# Altium PCB TC-temp-logger-base.PcbDoc (part 3 of 5)
Units mil, origin at the board's own origin, x right, y up, seen from the top; angles counter-clockwise.
Board outline 6370.08 x 6889.76 mil, 4 copper layers (Top Layer, Layer 2, Layer 1, Bottom Layer), stack 61.581 mil thick; 216 components, 163 nets, 792 pads, 3713 vias.
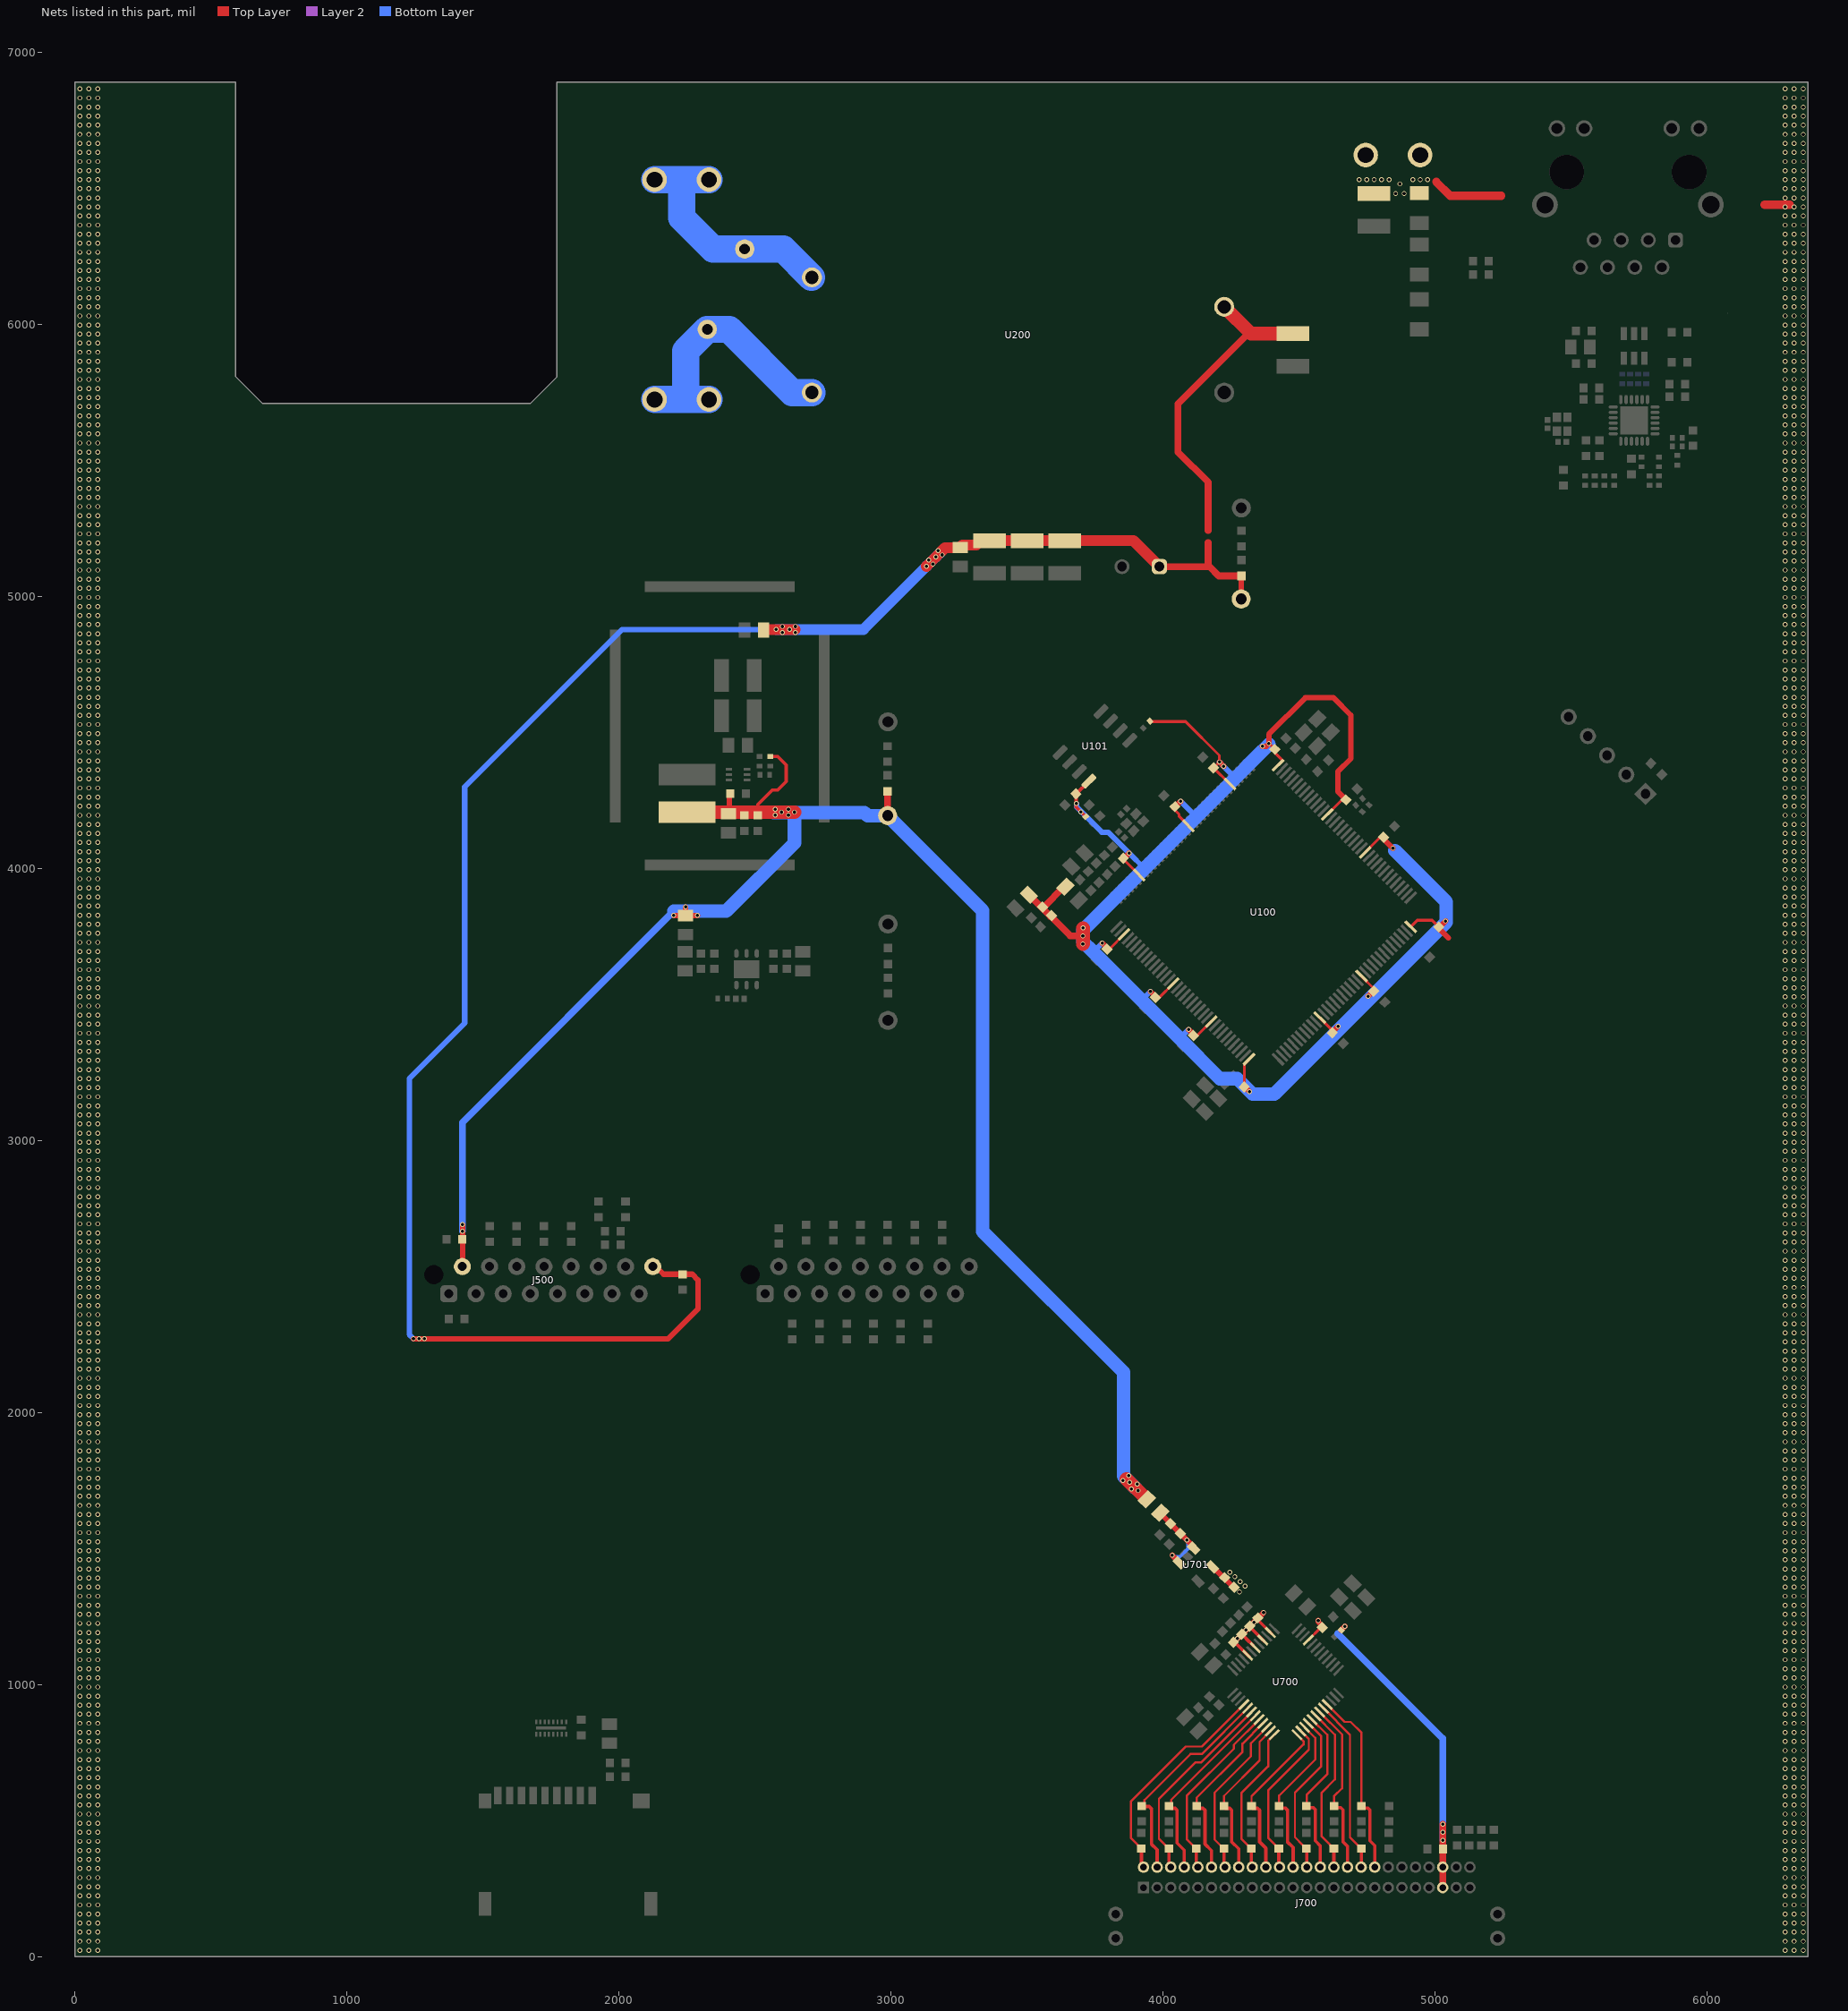
[diagram p4: the nets of this part, all layers, seen from the top]

## Via types
v1: diameter 17.72, hole 11.81, Top Layer to Bottom Layer, tented both sides, 3702 vias
v2: diameter 23.62, hole 11.81, Top Layer to Bottom Layer, 9 vias
v3: diameter 19.68, hole 7.87, Top Layer to Bottom Layer, tented both sides, 2 vias

## Nets (pads, with @x,y where several pads share a name; then routed paths per layer and width w, separated by ;. In a path a pad name is that pad's centre, name@x,y a point inside that pad or via, vN(x,y) a via of type N, cw(c..) or ccw(c..) an arc to the next point about the centre after c; other vN are vias at no path point) (continued)
AC_PE: (continued)
  other v1: 16.9,22.59 50.28,22.59 83.66,22.59 6286.42,22.59 6319.8,22.59 6353.17,22.59 16.9,55.97 50.28,55.97 83.66,55.97 6286.42,55.97 6319.8,55.97 6353.17,55.97 16.9,89.35 50.28,89.35 83.66,89.35 6286.42,89.35 6319.8,89.35 6353.17,89.35 16.9,122.73 50.28,122.73 83.66,122.73 6286.42,122.73 6319.8,122.73 6353.17,122.73 16.9,156.11 50.28,156.11 83.66,156.11 6286.42,156.11 6319.8,156.11 6353.17,156.11 16.9,189.49 50.28,189.49 83.66,189.49 6286.42,189.49 6319.8,189.49 6353.17,189.49 16.9,222.86 50.28,222.86 83.66,222.86 6286.42,222.86 6319.8,222.86 6353.17,222.86 16.9,256.24 50.28,256.24 83.66,256.24 6286.42,256.24 6319.8,256.24 6353.17,256.24 16.9,289.62 50.28,289.62 83.66,289.62 6286.42,289.62 6319.8,289.62 6353.17,289.62 16.9,323 50.28,323 83.66,323 6286.42,323 6319.8,323 6353.17,323 16.9,356.38 50.28,356.38 83.66,356.38 6286.42,356.38 6319.8,356.38 6353.17,356.38 16.9,389.76 50.28,389.76 83.66,389.76 6286.42,389.76 6319.8,389.76 6353.17,389.76 16.9,423.14 50.28,423.14 83.66,423.14 6286.42,423.14 6319.8,423.14 6353.17,423.14 16.9,456.51 50.28,456.51 83.66,456.51 6286.42,456.51 6319.8,456.51 6353.17,456.51 16.9,489.89 50.28,489.89 83.66,489.89 6286.42,489.89 6319.8,489.89 6353.17,489.89 16.9,523.27 50.28,523.27 83.66,523.27 6286.42,523.27 6319.8,523.27 6353.17,523.27 16.9,556.65 50.28,556.65 83.66,556.65 6286.42,556.65 6319.8,556.65 6353.17,556.65 16.9,590.03 50.28,590.03 83.66,590.03 6286.42,590.03 6319.8,590.03 6353.17,590.03 16.9,623.41 50.28,623.41 83.66,623.41 6286.42,623.41 6319.8,623.41 6353.17,623.41 16.9,656.79 50.28,656.79 83.66,656.79 6286.42,656.79 6319.8,656.79 6353.17,656.79 16.9,690.17 50.28,690.17 83.66,690.17 6286.42,690.16 6319.8,690.16 6353.17,690.16 16.9,723.54 50.28,723.54 83.66,723.54 6286.42,723.54 6319.8,723.54 6353.17,723.54 16.9,756.92 50.28,756.92 83.66,756.92 6286.42,756.92 6319.8,756.92 6353.17,756.92 16.9,790.3 50.28,790.3 83.66,790.3 6286.42,790.3 6319.8,790.3 6353.17,790.3 16.9,823.68 50.28,823.68 83.66,823.68 6286.42,823.68 6319.8,823.68 6353.17,823.68 16.9,857.06 50.28,857.06 83.66,857.06 6286.42,857.06 6319.8,857.06 6353.17,857.06 16.9,890.44 50.28,890.44 83.66,890.44 6286.42,890.44 6319.8,890.44 6353.17,890.44 16.9,923.82 50.28,923.82 83.66,923.82 6286.42,923.81 6319.8,923.81 6353.17,923.81 16.9,957.19 50.28,957.19 83.66,957.19 6286.42,957.19 6319.8,957.19 6353.17,957.19 16.9,990.57 50.28,990.57 83.66,990.57 6286.42,990.57 6319.8,990.57 6353.17,990.57 16.9,1023.95 50.28,1023.95 83.66,1023.95 6286.42,1023.95 6319.8,1023.95 6353.17,1023.95 16.9,1057.33 50.28,1057.33 83.66,1057.33 6286.42,1057.33 6319.8,1057.33 6353.17,1057.33 16.9,1090.71 50.28,1090.71 83.66,1090.71 6286.42,1090.71 6319.8,1090.71 6353.17,1090.71 16.9,1124.09 50.28,1124.09 83.66,1124.09 6286.42,1124.09 6319.8,1124.09 6353.17,1124.09 16.9,1157.47 50.28,1157.47 83.66,1157.47 6286.42,1157.46 6319.8,1157.46 6353.17,1157.46 16.9,1190.84 50.28,1190.84 83.66,1190.84 6286.42,1190.84 6319.8,1190.84 6353.17,1190.84 16.9,1224.22 50.28,1224.22 83.66,1224.22 6286.42,1224.22 6319.8,1224.22 6353.17,1224.22 16.9,1257.6 50.28,1257.6 83.66,1257.6 6286.42,1257.6 6319.8,1257.6 6353.17,1257.6 16.9,1290.98 50.28,1290.98 83.66,1290.98 6286.42,1290.98 6319.8,1290.98 6353.17,1290.98 16.9,1324.36 50.28,1324.36 83.66,1324.36 6286.42,1324.36 6319.8,1324.36 6353.17,1324.36 16.9,1357.74 50.28,1357.74 83.66,1357.74 6286.42,1357.74 6319.8,1357.74 6353.17,1357.74 16.9,1391.12 50.28,1391.12 83.66,1391.12 6286.42,1391.12 6319.8,1391.12 6353.17,1391.12 16.9,1424.49 50.28,1424.49 83.66,1424.49 6286.42,1424.49 6319.8,1424.49 6353.17,1424.49 16.9,1457.87 50.28,1457.87 83.66,1457.87 6286.42,1457.87 6319.8,1457.87 6353.17,1457.87 16.9,1491.25 50.28,1491.25 83.66,1491.25 6286.42,1491.25 6319.8,1491.25 6353.17,1491.25 16.9,1524.63 50.28,1524.63 83.66,1524.63 6286.42,1524.63 6319.8,1524.63 6353.17,1524.63 16.9,1558.01 50.28,1558.01 83.66,1558.01 6286.42,1558.01 6319.8,1558.01 6353.17,1558.01 16.9,1591.39 50.28,1591.39 83.66,1591.39 6286.42,1591.39 6319.8,1591.39 6353.17,1591.39 16.9,1624.77 50.28,1624.77 83.66,1624.77 6286.42,1624.77 6319.8,1624.77 6353.17,1624.77 16.9,1658.14 50.28,1658.14 83.66,1658.14 6286.42,1658.14 6319.8,1658.14 6353.17,1658.14 16.9,1691.52 50.28,1691.52 83.66,1691.52 6286.42,1691.52 6319.8,1691.52 6353.17,1691.52 16.9,1724.9 50.28,1724.9 83.66,1724.9 6286.42,1724.9 6319.8,1724.9 6353.17,1724.9 16.9,1758.28 50.28,1758.28 83.66,1758.28 6286.42,1758.28 6319.8,1758.28 6353.17,1758.28 16.9,1791.66 50.28,1791.66 83.66,1791.66 6286.42,1791.66 6319.8,1791.66 6353.17,1791.66 16.9,1825.04 50.28,1825.04 83.66,1825.04 6286.42,1825.04 6319.8,1825.04 6353.17,1825.04 16.9,1858.42 50.28,1858.42 83.66,1858.42 6286.42,1858.42 6319.8,1858.42 6353.17,1858.42 16.9,1891.79 50.28,1891.79 83.66,1891.79 6286.42,1891.79 6319.8,1891.79 6353.17,1891.79 16.9,1925.17 50.28,1925.17 83.66,1925.17 6286.42,1925.17 6319.8,1925.17 6353.17,1925.17 16.9,1958.55 50.28,1958.55 83.66,1958.55 6286.42,1958.55 6319.8,1958.55 6353.17,1958.55 16.9,1991.93 50.28,1991.93 83.66,1991.93 6286.42,1991.93 6319.8,1991.93 6353.17,1991.93 16.9,2025.31 50.28,2025.31 83.66,2025.31 6286.42,2025.31 6319.8,2025.31 6353.17,2025.31 16.9,2058.69 50.28,2058.69 83.66,2058.69 6286.42,2058.69 6319.8,2058.69 6353.17,2058.69 16.9,2092.07 50.28,2092.07 83.66,2092.07 6286.42,2092.07 6319.8,2092.07 6353.17,2092.07 16.9,2125.44 50.28,2125.44 83.66,2125.44 6286.42,2125.44 6319.8,2125.44 6353.17,2125.44 16.9,2158.82 50.28,2158.82 83.66,2158.82 6286.42,2158.82 6319.8,2158.82 6353.17,2158.82 16.9,2192.2 50.28,2192.2 83.66,2192.2 6286.42,2192.2 6319.8,2192.2 6353.17,2192.2 16.9,2225.58 50.28,2225.58 83.66,2225.58 6286.42,2225.58 6319.8,2225.58 6353.17,2225.58 16.9,2258.96 50.28,2258.96 83.66,2258.96 6286.42,2258.96 6319.8,2258.96 6353.17,2258.96 16.9,2292.34 50.28,2292.34 83.66,2292.34 6286.42,2292.34 6319.8,2292.34 6353.17,2292.34 16.9,2325.72 50.28,2325.72 83.66,2325.72 6286.42,2325.72 6319.8,2325.72 6353.17,2325.72 16.9,2359.1 50.28,2359.1 83.66,2359.1 6286.42,2359.09 6319.8,2359.09 6353.17,2359.09 16.9,2392.47 50.28,2392.47 83.66,2392.47 6286.42,2392.47 6319.8,2392.47 6353.17,2392.47 16.9,2425.85 50.28,2425.85 83.66,2425.85 6286.42,2425.85 6319.8,2425.85 6353.17,2425.85 16.9,2459.23 50.28,2459.23 83.66,2459.23 6286.42,2459.23 6319.8,2459.23 6353.17,2459.23 16.9,2492.61 50.28,2492.61 83.66,2492.61 6286.42,2492.61 6319.8,2492.61 6353.17,2492.61 16.9,2525.99 50.28,2525.99 83.66,2525.99 6286.42,2525.99 6319.8,2525.99 6353.17,2525.99 16.9,2559.37 50.28,2559.37 83.66,2559.37 6286.42,2559.37 6319.8,2559.37 6353.17,2559.37 16.9,2592.75 50.28,2592.75 83.66,2592.75 6286.42,2592.74 6319.8,2592.74 6353.17,2592.74 16.9,2626.12 50.28,2626.12 83.66,2626.12 6286.42,2626.12 6319.8,2626.12 6353.17,2626.12 16.9,2659.5 50.28,2659.5 83.66,2659.5 6286.42,2659.5 6319.8,2659.5 6353.17,2659.5 16.9,2692.88 50.28,2692.88 83.66,2692.88 6286.42,2692.88 6319.8,2692.88 6353.17,2692.88 16.9,2726.26 50.28,2726.26 83.66,2726.26 6286.42,2726.26 6319.8,2726.26 6353.17,2726.26 16.9,2759.64 50.28,2759.64 83.66,2759.64 6286.42,2759.64 6319.8,2759.64 6353.17,2759.64 16.9,2793.02 50.28,2793.02 83.66,2793.02 6286.42,2793.02 6319.8,2793.02 6353.17,2793.02 16.9,2826.4 50.28,2826.4 83.66,2826.4 6286.42,2826.39 6319.8,2826.39 6353.17,2826.39 16.9,2859.77 50.28,2859.77 83.66,2859.77 6286.42,2859.77 6319.8,2859.77 6353.17,2859.77 16.9,2893.15 50.28,2893.15 83.66,2893.15 6286.42,2893.15 6319.8,2893.15 6353.17,2893.15 16.9,2926.53 50.28,2926.53 83.66,2926.53 6286.42,2926.53 6319.8,2926.53 6353.17,2926.53 16.9,2959.91 50.28,2959.91 83.66,2959.91 6286.42,2959.91 6319.8,2959.91 6353.17,2959.91 16.9,2993.29 50.28,2993.29 83.66,2993.29 6286.42,2993.29 6319.8,2993.29 6353.17,2993.29 16.9,3026.67 50.28,3026.67 83.66,3026.67 6286.42,3026.67 6319.8,3026.67 6353.17,3026.67 16.9,3060.05 50.28,3060.05 83.66,3060.05 6286.42,3060.05 6319.8,3060.05 6353.17,3060.05 16.9,3093.42 50.28,3093.42 83.66,3093.42 6286.42,3093.42 6319.8,3093.42 6353.17,3093.42 16.9,3126.8 50.28,3126.8 83.66,3126.8 6286.42,3126.8 6319.8,3126.8 6353.17,3126.8 16.9,3160.18 50.28,3160.18 83.66,3160.18 6286.42,3160.18 6319.8,3160.18 6353.17,3160.18 16.9,3193.56 50.28,3193.56 83.66,3193.56 6286.42,3193.56 6319.8,3193.56 6353.17,3193.56 16.9,3226.94 50.28,3226.94 83.66,3226.94 6286.42,3226.94 6319.8,3226.94 6353.17,3226.94 16.9,3260.32 50.28,3260.32 83.66,3260.32 6286.42,3260.32 6319.8,3260.32 6353.17,3260.32 16.9,3293.7 50.28,3293.7 83.66,3293.7 6286.42,3293.7 6319.8,3293.7 6353.17,3293.7 16.9,3327.07 50.28,3327.07 83.66,3327.07 6286.42,3327.07 6319.8,3327.07 6353.17,3327.07 16.9,3360.45 50.28,3360.45 83.66,3360.45 6286.42,3360.45 6319.8,3360.45 6353.17,3360.45 16.9,3393.83 50.28,3393.83 83.66,3393.83 6286.42,3393.83 6319.8,3393.83 6353.17,3393.83 16.9,3427.21 50.28,3427.21 83.66,3427.21 6286.42,3427.21 6319.8,3427.21 6353.17,3427.21 16.9,3460.59 50.28,3460.59 83.66,3460.59 6286.42,3460.59 6319.8,3460.59 6353.17,3460.59 16.9,3493.97 50.28,3493.97 83.66,3493.97 6286.42,3493.97 6319.8,3493.97 6353.17,3493.97 16.9,3527.35 50.28,3527.35 83.66,3527.35 6286.42,3527.35 6319.8,3527.35 6353.17,3527.35 16.9,3560.72 50.28,3560.72 83.66,3560.72 6286.42,3560.72 6319.8,3560.72 6353.17,3560.72 16.9,3594.1 50.28,3594.1 83.66,3594.1 6286.42,3594.1 6319.8,3594.1 6353.17,3594.1 16.9,3627.48 50.28,3627.48 83.66,3627.48 6286.42,3627.48 6319.8,3627.48 6353.17,3627.48 16.9,3660.86 50.28,3660.86 83.66,3660.86 6286.42,3660.86 6319.8,3660.86 6353.17,3660.86 16.9,3694.24 50.28,3694.24 83.66,3694.24 6286.42,3694.24 6319.8,3694.24 6353.17,3694.24 16.9,3727.62 50.28,3727.62 83.66,3727.62 6286.42,3727.62 6319.8,3727.62 6353.17,3727.62 16.9,3761 50.28,3761 83.66,3761 6286.42,3761 6319.8,3761 6353.17,3761 16.9,3794.37 50.28,3794.37 83.66,3794.37 6286.42,3794.37 6319.8,3794.37 6353.17,3794.37 16.9,3827.75 50.28,3827.75 83.66,3827.75 6286.42,3827.75 6319.8,3827.75 6353.17,3827.75 16.9,3861.13 50.28,3861.13 83.66,3861.13 6286.42,3861.13 6319.8,3861.13 6353.17,3861.13 16.9,3894.51 50.28,3894.51 83.66,3894.51 6286.42,3894.51 6319.8,3894.51 6353.17,3894.51 16.9,3927.89 50.28,3927.89 83.66,3927.89 6286.42,3927.89 6319.8,3927.89 6353.17,3927.89 16.9,3961.27 50.28,3961.27 83.66,3961.27 6286.42,3961.27 6319.8,3961.27 6353.17,3961.27 16.9,3994.65 50.28,3994.65 83.66,3994.65 6286.42,3994.65 6319.8,3994.65 6353.17,3994.65 16.9,4028.03 50.28,4028.03 83.66,4028.03 6286.42,4028.02 6319.8,4028.02 6353.17,4028.02 16.9,4061.4 50.28,4061.4 83.66,4061.4 6286.42,4061.4 6319.8,4061.4 6353.17,4061.4 16.9,4094.78 50.28,4094.78 83.66,4094.78 6286.42,4094.78 6319.8,4094.78 6353.17,4094.78 16.9,4128.16 50.28,4128.16 83.66,4128.16 6286.42,4128.16 6319.8,4128.16 6353.17,4128.16 16.9,4161.54 50.28,4161.54 83.66,4161.54 6286.42,4161.54 6319.8,4161.54 6353.17,4161.54 16.9,4194.92 50.28,4194.92 83.66,4194.92 6286.42,4194.92 6319.8,4194.92 6353.17,4194.92 16.9,4228.3 50.28,4228.3 83.66,4228.3 6286.42,4228.3 6319.8,4228.3 6353.17,4228.3 16.9,4261.68 50.28,4261.68 83.66,4261.68 6286.42,4261.67 6319.8,4261.67 6353.17,4261.67 16.9,4295.05 50.28,4295.05 83.66,4295.05 6286.42,4295.05 6319.8,4295.05 6353.17,4295.05 16.9,4328.43 50.28,4328.43 83.66,4328.43 6286.42,4328.43 6319.8,4328.43 6353.17,4328.43 16.9,4361.81 50.28,4361.81 83.66,4361.81 6286.42,4361.81 6319.8,4361.81 6353.17,4361.81 16.9,4395.19 50.28,4395.19 83.66,4395.19 6286.42,4395.19 6319.8,4395.19 6353.17,4395.19 16.9,4428.57 50.28,4428.57 83.66,4428.57 6286.42,4428.57 6319.8,4428.57 6353.17,4428.57 16.9,4461.95 50.28,4461.95 83.66,4461.95 6286.42,4461.95 6319.8,4461.95 6353.17,4461.95 16.9,4495.33 50.28,4495.33 83.66,4495.33 6286.42,4495.32 6319.8,4495.32 6353.17,4495.32 16.9,4528.7 50.28,4528.7 83.66,4528.7 6286.42,4528.7 6319.8,4528.7 6353.17,4528.7 16.9,4562.08 50.28,4562.08 83.66,4562.08 6286.42,4562.08 6319.8,4562.08 6353.17,4562.08 16.9,4595.46 50.28,4595.46 83.66,4595.46 6286.42,4595.46 6319.8,4595.46 6353.17,4595.46 16.9,4628.84 50.28,4628.84 83.66,4628.84 6286.42,4628.84 6319.8,4628.84 6353.17,4628.84 16.9,4662.22 50.28,4662.22 83.66,4662.22 6286.42,4662.22 6319.8,4662.22 6353.17,4662.22 16.9,4695.6 50.28,4695.6 83.66,4695.6 6286.42,4695.6 6319.8,4695.6 6353.17,4695.6 16.9,4728.98 50.28,4728.98 83.66,4728.98 6286.42,4728.98 6319.8,4728.98 6353.17,4728.98 16.9,4762.35 50.28,4762.35 83.66,4762.35 6286.42,4762.35 6319.8,4762.35 6353.17,4762.35 16.9,4795.73 50.28,4795.73 83.66,4795.73 6286.42,4795.73 6319.8,4795.73 6353.17,4795.73 16.9,4829.11 50.28,4829.11 83.66,4829.11 6286.42,4829.11 6319.8,4829.11 6353.17,4829.11 16.9,4862.49 50.28,4862.49 83.66,4862.49 6286.42,4862.49 6319.8,4862.49 6353.17,4862.49 16.9,4895.87 50.28,4895.87 83.66,4895.87 6286.42,4895.87 6319.8,4895.87 6353.17,4895.87 16.9,4929.25 50.28,4929.25 83.66,4929.25 6286.42,4929.25 6319.8,4929.25 6353.17,4929.25 16.9,4962.63 50.28,4962.63 83.66,4962.63 6286.42,4962.63 6319.8,4962.63 6353.17,4962.63 16.9,4996 50.28,4996 83.66,4996 6286.42,4996 6319.8,4996 6353.17,4996 16.9,5029.38 50.28,5029.38 83.66,5029.38 6286.42,5029.38 6319.8,5029.38 6353.17,5029.38 16.9,5062.76 50.28,5062.76 83.66,5062.76 6286.42,5062.76 6319.8,5062.76 6353.17,5062.76 16.9,5096.14 50.28,5096.14 83.66,5096.14 6286.42,5096.14 6319.8,5096.14 6353.17,5096.14 16.9,5129.52 50.28,5129.52 83.66,5129.52 6286.42,5129.52 6319.8,5129.52 6353.17,5129.52 16.9,5162.9 50.28,5162.9 83.66,5162.9 6286.42,5162.9 6319.8,5162.9 6353.17,5162.9 16.9,5196.28 50.28,5196.28 83.66,5196.28 6286.42,5196.28 6319.8,5196.28 6353.17,5196.28 16.9,5229.65 50.28,5229.65 83.66,5229.65 6286.42,5229.65 6319.8,5229.65 6353.17,5229.65 16.9,5263.03 50.28,5263.03 83.66,5263.03 6286.42,5263.03 6319.8,5263.03 6353.17,5263.03 16.9,5296.41 50.28,5296.41 83.66,5296.41 6286.42,5296.41 6319.8,5296.41 6353.17,5296.41 16.9,5329.79 50.28,5329.79 83.66,5329.79 6286.42,5329.79 6319.8,5329.79 6353.17,5329.79 16.9,5363.17 50.28,5363.17 83.66,5363.17 6286.42,5363.17 6319.8,5363.17 6353.17,5363.17 16.9,5396.55 50.28,5396.55 83.66,5396.55 6286.42,5396.55 6319.8,5396.55 6353.17,5396.55 16.9,5429.93 50.28,5429.93 83.66,5429.93 6286.42,5429.93 6319.8,5429.93 6353.17,5429.93 16.9,5463.3 50.28,5463.3 83.66,5463.3 6286.42,5463.3 6319.8,5463.3 6353.17,5463.3 16.9,5496.68 50.28,5496.68 83.66,5496.68 6286.42,5496.68 6319.8,5496.68 6353.17,5496.68 16.9,5530.06 50.28,5530.06 83.66,5530.06 6286.42,5530.06 6319.8,5530.06 6353.17,5530.06 16.9,5563.44 50.28,5563.44 83.66,5563.44 6286.42,5563.44 6319.8,5563.44 6353.17,5563.44 16.9,5596.82 50.28,5596.82 83.66,5596.82 6286.42,5596.82 6319.8,5596.82 6353.17,5596.82 16.9,5630.2 50.28,5630.2 83.66,5630.2 6286.42,5630.2 6319.8,5630.2 6353.17,5630.2 16.9,5663.58 50.28,5663.58 83.66,5663.58 6286.42,5663.58 6319.8,5663.58 6353.17,5663.58 16.9,5696.96 50.28,5696.96 83.66,5696.96 6286.42,5696.95 6319.8,5696.95 6353.17,5696.95 16.9,5730.33 50.28,5730.33 83.66,5730.33 6286.42,5730.33 6319.8,5730.33 6353.17,5730.33 16.9,5763.71 50.28,5763.71 83.66,5763.71 6286.42,5763.71 6319.8,5763.71 6353.17,5763.71 16.9,5797.09 50.28,5797.09 83.66,5797.09 6286.42,5797.09 6319.8,5797.09 6353.17,5797.09 16.9,5830.47 50.28,5830.47 83.66,5830.47 6286.42,5830.47 6319.8,5830.47 6353.17,5830.47 16.9,5863.85 50.28,5863.85 83.66,5863.85 6286.42,5863.85 6319.8,5863.85 6353.17,5863.85 16.9,5897.23 50.28,5897.23 83.66,5897.23 6286.42,5897.23 6319.8,5897.23 6353.17,5897.23 16.9,5930.61 50.28,5930.61 83.66,5930.61 6286.42,5930.6 6319.8,5930.6 6353.17,5930.6 16.9,5963.98 50.28,5963.98 83.66,5963.98 6286.42,5963.98 6319.8,5963.98 6353.17,5963.98 16.9,5997.36 50.28,5997.36 83.66,5997.36 6286.42,5997.36 6319.8,5997.36 6353.17,5997.36 16.9,6030.74 50.28,6030.74 83.66,6030.74 6286.42,6030.74 6319.8,6030.74 6353.17,6030.74 16.9,6064.12 50.28,6064.12 83.66,6064.12 6286.42,6064.12 6319.8,6064.12 6353.17,6064.12 16.9,6097.5 50.28,6097.5 83.66,6097.5 6286.42,6097.5 6319.8,6097.5 6353.17,6097.5 16.9,6130.88 50.28,6130.88 83.66,6130.88 6286.42,6130.88 6319.8,6130.88 6353.17,6130.88 16.9,6164.26 50.28,6164.26 83.66,6164.26 6286.42,6164.26 6319.8,6164.26 6353.17,6164.26 16.9,6197.63 50.28,6197.63 83.66,6197.63 6286.42,6197.63 6319.8,6197.63 6353.17,6197.63 16.9,6231.01 50.28,6231.01 83.66,6231.01 6286.42,6231.01 6319.8,6231.01 6353.17,6231.01 16.9,6264.39 50.28,6264.39 83.66,6264.39 6286.42,6264.39 6319.8,6264.39 6353.17,6264.39 16.9,6297.77 50.28,6297.77 83.66,6297.77 6286.42,6297.77 6319.8,6297.77 6353.17,6297.77 16.9,6331.15 50.28,6331.15 83.66,6331.15 6286.42,6331.15 6319.8,6331.15 6353.17,6331.15 16.9,6364.53 50.28,6364.53 83.66,6364.53 6286.42,6364.53 6319.8,6364.53 6353.17,6364.53 16.9,6397.91 50.28,6397.91 83.66,6397.91 6286.42,6397.91 6319.8,6397.91 6353.17,6397.91 16.9,6431.28 50.28,6431.28 83.66,6431.28 6286.42,6431.28 6319.8,6431.28 6353.17,6431.28 16.9,6464.66 50.28,6464.66 83.66,6464.66 6286.42,6464.66 6319.8,6464.66 6353.17,6464.66 4854.33,6480.31 4885.83,6480.31 16.9,6498.04 50.28,6498.04 83.66,6498.04 6286.42,6498.04 6319.8,6498.04 6353.17,6498.04 4870.08,6515.75 16.9,6531.42 50.28,6531.42 83.66,6531.42 4720.47,6531.5 4748.03,6531.5 4775.59,6531.5 4803.15,6531.5 4830.71,6531.5 4917.32,6531.5 4944.88,6531.5 4972.44,6531.5 6286.42,6531.42 6319.8,6531.42 6353.17,6531.42 16.9,6564.8 50.28,6564.8 83.66,6564.8 6286.42,6564.8 6319.8,6564.8 6353.17,6564.8 16.9,6598.18 50.28,6598.18 83.66,6598.18 6286.42,6598.18 6319.8,6598.18 6353.17,6598.18 16.9,6631.56 50.28,6631.56 83.66,6631.56 6286.42,6631.56 6319.8,6631.56 6353.17,6631.56 16.9,6664.93 50.28,6664.93 83.66,6664.93 6286.42,6664.93 6319.8,6664.93 6353.17,6664.93 16.9,6698.31 50.28,6698.31 83.66,6698.31 6286.42,6698.31 6319.8,6698.31 6353.17,6698.31 16.9,6731.69 50.28,6731.69 83.66,6731.69 6286.42,6731.69 6319.8,6731.69 6353.17,6731.69 16.9,6765.07 50.28,6765.07 83.66,6765.07 6286.42,6765.07 6319.8,6765.07 6353.17,6765.07 16.9,6798.45 50.28,6798.45 83.66,6798.45 6286.42,6798.45 6319.8,6798.45 6353.17,6798.45 16.9,6831.83 50.28,6831.83 83.66,6831.83 6286.42,6831.83 6319.8,6831.83 6353.17,6831.83 16.9,6865.21 50.28,6865.21 83.66,6865.21 6286.42,6865.21 6319.8,6865.21 6353.17,6865.21
CH1_7: C700.1 J700.02 U700.16 | length 824.5
  Top Layer w8: C700.1@3920,396.46 3919.02,396.46 3908.25,407.22 3908.25,408.2 3881.89,434.57 3881.89,570.87 4082.68,771.65 4142.06,771.65 U700.16@4296.89,926.48
  Top Layer w12: C700.1@3920,396.46 3920,343.86 3927.56,336.3 J700.02@3927.56,328.15
CH2_7: C710.1 J700.04 U700.17 | length 809.5
  Top Layer w8: C710.1@3920.53,553.54 3930.93,563.94 3930.93,574.63 4100.39,744.09 4142.34,744.09 U700.17@4310.81,912.56
  Top Layer w12: C710.1@3920.53,553.54 3922.89,551.18 3948.82,551.18 3956.69,543.31 3956.69,413.39 3977.56,392.52 J700.04@3977.56,328.15
CH3_7: C701.1 J700.06 U700.18 | length 742.1
  Top Layer w8: C701.1@4021.05,396.46 4020.07,396.46 4009.3,407.22 4009.3,408.2 3984.25,433.26 3984.25,578.74 4118.11,712.6 4138.68,712.6 U700.18@4324.73,898.64
  Top Layer w12: C701.1@4021.05,396.46 4021.05,350.24 4021.79,349.5 4021.79,333.91 J700.06@4027.56,328.15
CH4_7: C711.1 J700.08 U700.19 | length 719.5
  Top Layer w8: C711.1@4021.58,553.54 4029.54,561.5 4029.54,575.62 U700.19@4338.64,884.73
  Top Layer w12: C711.1@4021.05,553.02 4029.29,544.78 4044.15,544.78 4051.18,537.75 4051.18,417.32 4077.56,390.94 J700.08@4077.56,328.15
CH5_7: C702.1 J700.10 U700.20 | length 670.4
  Top Layer w8: C702.1@4122.11,396.46 4121.12,396.46 4086.61,430.96 4086.61,590.55 4259.84,763.78 4259.84,778.08 U700.20@4352.56,870.81
  Top Layer w12: C702.1@4122.11,396.46 4122.11,333.6 J700.10@4127.56,328.15
CH6_7: C712.1 J700.12 U700.21 | length 660.1
  Top Layer w8: C712.1@4122.63,553.54 4122.63,583.26 4291.34,751.97 4291.34,781.74 U700.21@4366.48,856.89
  Top Layer w12: C712.1@4122.89,551.18 4129.29,544.78 4146.51,544.78 4153.54,537.75 4153.54,413.39 4177.56,389.37 J700.12@4177.56,328.15
CH7_7: C703.1 J700.14 U700.22 | length 610.7
  Top Layer w8: C703.1@4223.16,396.46 4222.17,396.46 4188.98,429.65 4188.98,602.36 4322.83,736.22 4322.83,784.1 4380.4,841.66 U700.22@4380.4,842.97
  Top Layer w12: C703.1@4223.16,396.46 4223.16,332.55 J700.14@4227.56,328.15
CH8_7: C713.1 J700.16 U700.23 | length 601
  Top Layer w8: C713.1@4223.68,553.54 4223.68,589.83 4354.33,720.47 4354.33,789.06 U700.23@4394.32,829.05
  Top Layer w12: C713.1@4222.89,551.18 4229.29,544.78 4244.94,544.78 4251.97,537.75 4251.97,421.26 4277.56,395.67 J700.16@4277.56,328.15
CH9_7: C704.1 J700.18 U700.24 | length 554.2
  Top Layer w8: C704.1@4324.21,396.46 4323.23,396.46 4287.4,432.28 4287.4,600.29 4385.83,698.72 4385.83,792.71 U700.24@4408.24,815.13
  Top Layer w12: C704.1@4324.21,396.46 4324.21,331.5 J700.18@4327.56,328.15
CH10_7: C714.1 J700.20 U700.25 | length 606.9
  Top Layer w8: C714.1@4324.74,553.54 4324.74,588.52 4515.75,779.53 4515.75,791.14 U700.25@4491.76,815.13
  Top Layer w12: C714.1@4322.89,551.18 4329.29,544.78 4347.3,544.78 4354.33,537.75 4354.33,421.26 4377.56,398.03 J700.20@4377.56,328.15
CH11_7: C705.1 J700.22 U700.26 | length 593.1
  Top Layer w8: C705.1@4425.26,396.46 4424.28,396.46 4413.51,407.22 4413.51,408.2 4385.83,435.89 4385.83,610.24 4535.43,759.84 4535.43,799.29 U700.26@4505.68,829.05
  Top Layer w12: C705.1@4425.26,396.46 4425.26,330.45 J700.22@4427.56,328.15
CH12_7: C715.1 J700.24 U700.27 | length 619
  Top Layer w8: C715.1@4425.79,553.54 4425.79,591.14 4559.06,724.41 4559.06,803.51 U700.27@4519.6,842.97
  Top Layer w12: C715.1@4422.89,551.18 4428.62,545.45 4449.66,545.45 4456.69,538.42 4456.69,421.26 4477.56,400.39 J700.24@4477.56,328.15
CH13_7: C706.1 J700.26 U700.28 | length 607.2
  Top Layer w8: C706.1@4527.56,395.21 4526.57,395.21 4514.57,407.22 4514.57,408.2 4484.25,438.52 4484.25,602.36 4581.21,699.32 4581.21,809.19 U700.28@4533.52,856.89
  Top Layer w12: J700.26@4527.56,328.15 C706.1@4527.56,395.21
CH14_7: C716.1 J700.28 U700.29 | length 632.1
  Top Layer w8: C716.1@4526.84,553.54 4527.56,554.26 4527.56,594.49 4603.18,670.11 4603.18,815.06 U700.29@4547.44,870.81
  Top Layer w12: C716.1@4522.89,551.18 4527.31,546.76 4552.03,546.76 4559.06,539.73 4559.06,425.2 4577.56,406.69 J700.28@4577.56,328.15
CH15_7: C707.1 J700.30 U700.30 | length 624.3
  Top Layer w8: U700.30@4561.36,884.73 4631,815.08 4631,650.68 4582.68,602.36 4582.68,441.15 4615.62,408.2 4615.62,407.22 4626.38,396.46 C707.1@4627.37,396.46
  Top Layer w12: J700.30@4627.56,328.15 C707.1@4627.56,396.27
CH16_7: C717.1 J700.32 U700.31 | length 652.5
  Top Layer w8: U700.31@4575.27,898.64 4657.72,816.2 4657.72,618.35 4627.89,588.52 C717.1@4627.89,553.54
  Top Layer w12: C717.1@4622.89,551.18 4627.23,546.84 4653.16,546.84 4661.42,538.58 4661.42,421.26 4677.56,405.12 J700.32@4677.56,328.15
CH17_7: C708.1 J700.34 U700.32 | length 643
  Top Layer w8: U700.32@4589.19,912.56 4686.8,814.96 4686.8,438.08 4716.67,408.2 4716.67,407.22 4727.44,396.46 C708.1@4728.42,396.46
  Top Layer w12: J700.34@4727.56,328.15 4728.42,329.01 C708.1@4728.42,396.46
CH18_7: C718.1 J700.36 U700.33 | length 694.9
  Top Layer w8: U700.33@4603.11,926.48 4667.39,862.2 4688.98,862.2 4728.95,822.23 C718.1@4728.95,553.54
  Top Layer w12: C718.1@4724.74,549.33 4728.63,545.44 4752.81,545.44 4759.84,538.41 4759.84,425.2 4777.56,407.48 J700.36@4777.56,328.15